# EAGLE board SparkFun_Qwiic_pHAT_Extension-Panel (EAGLE 9.5.2)
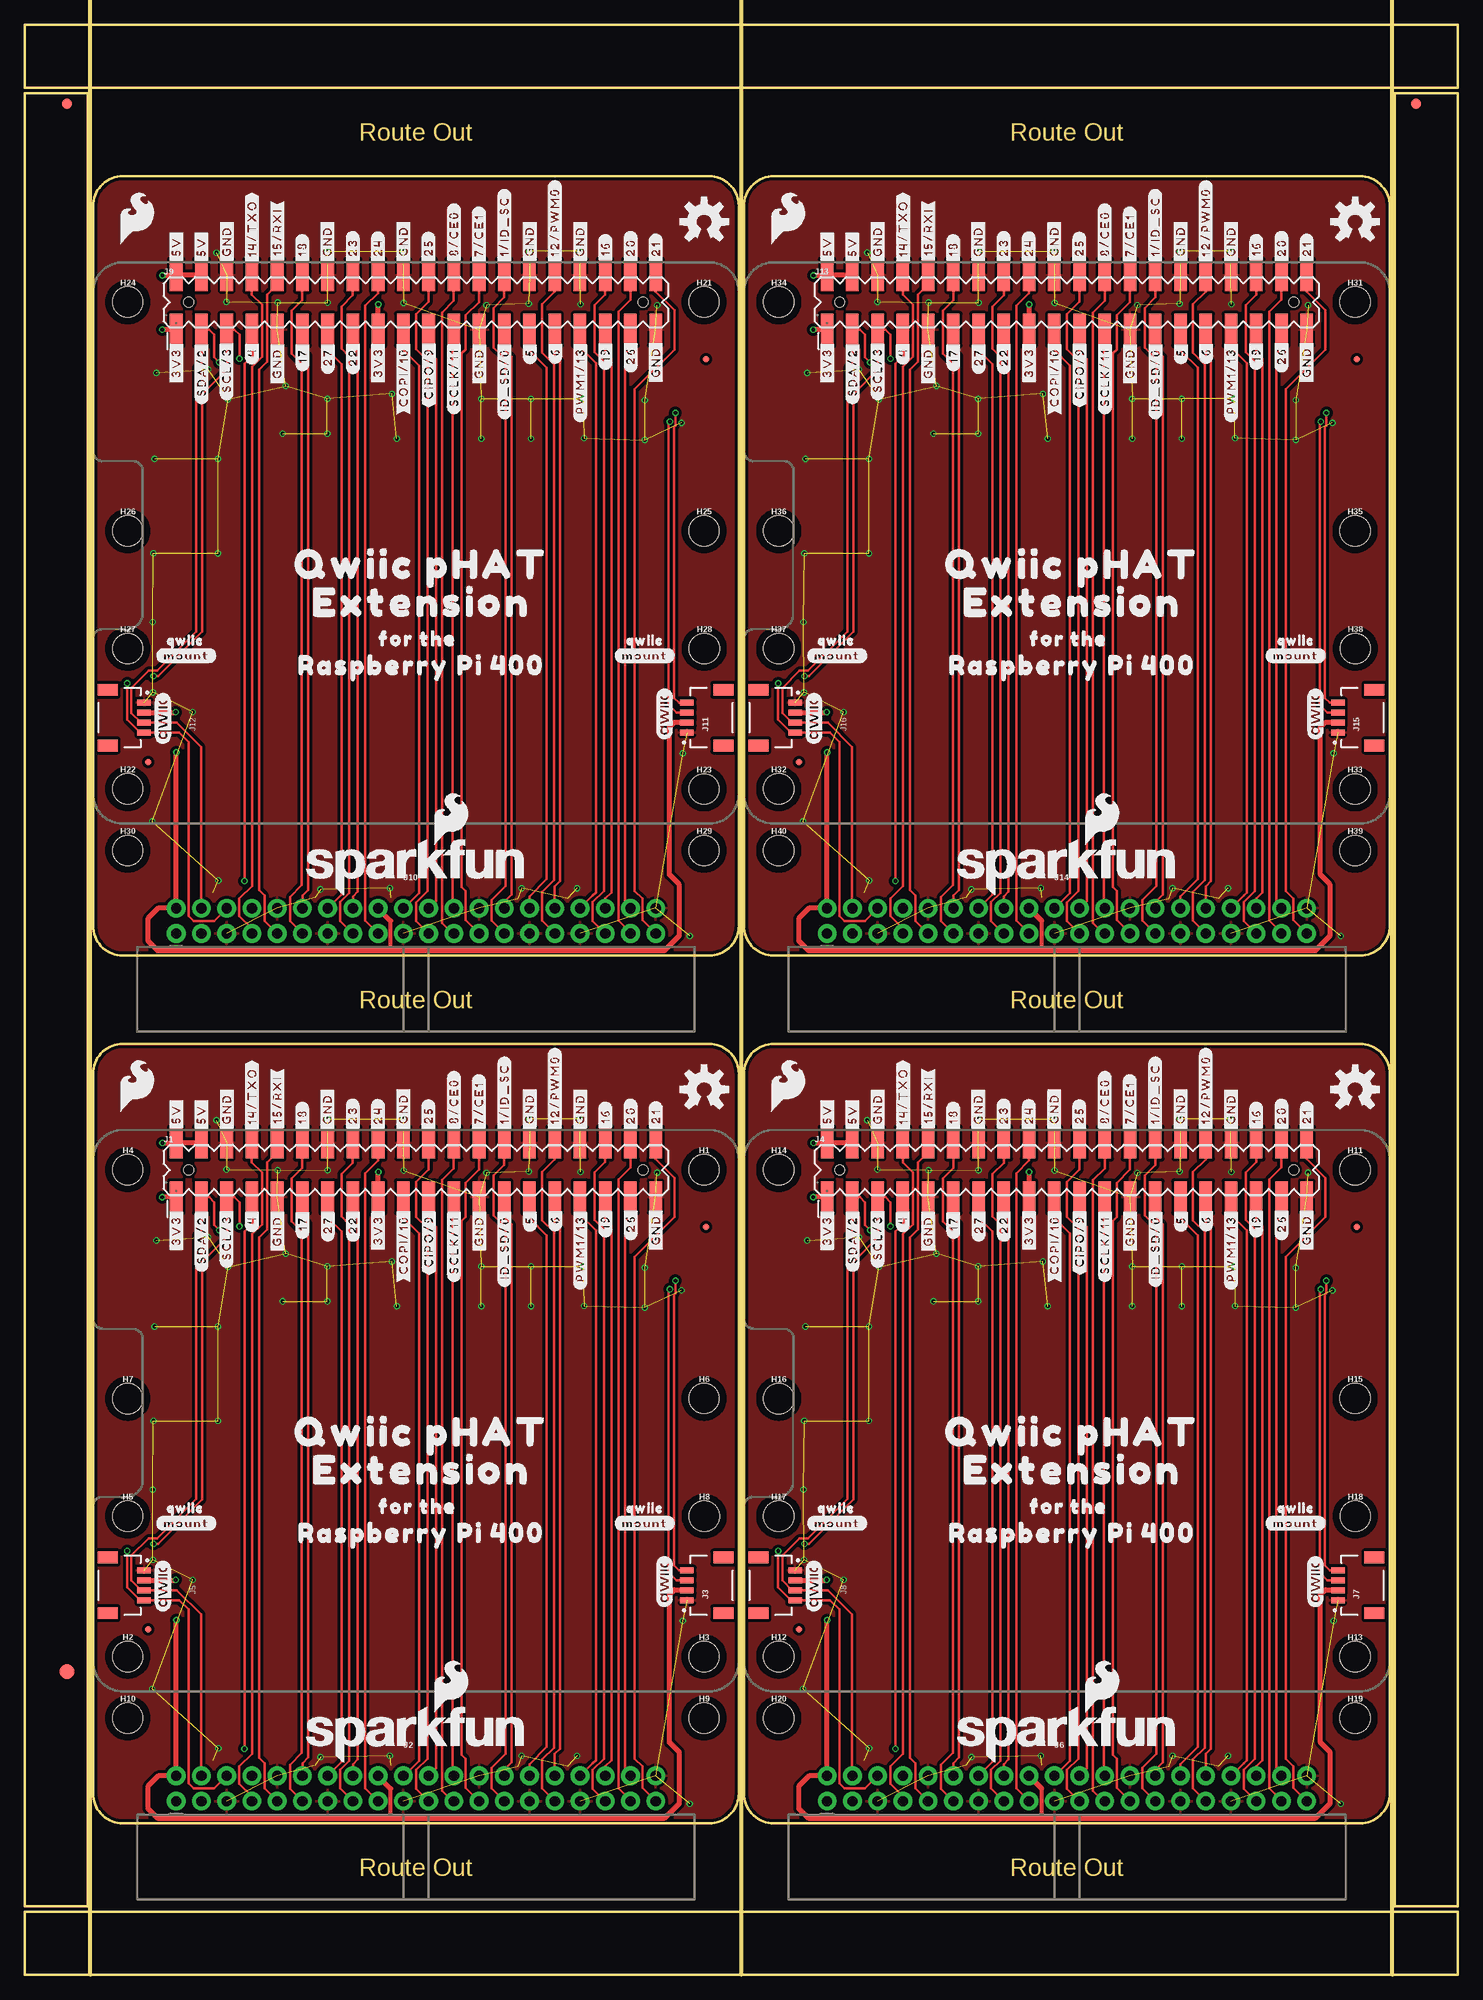
[diagram p0: board, top side]
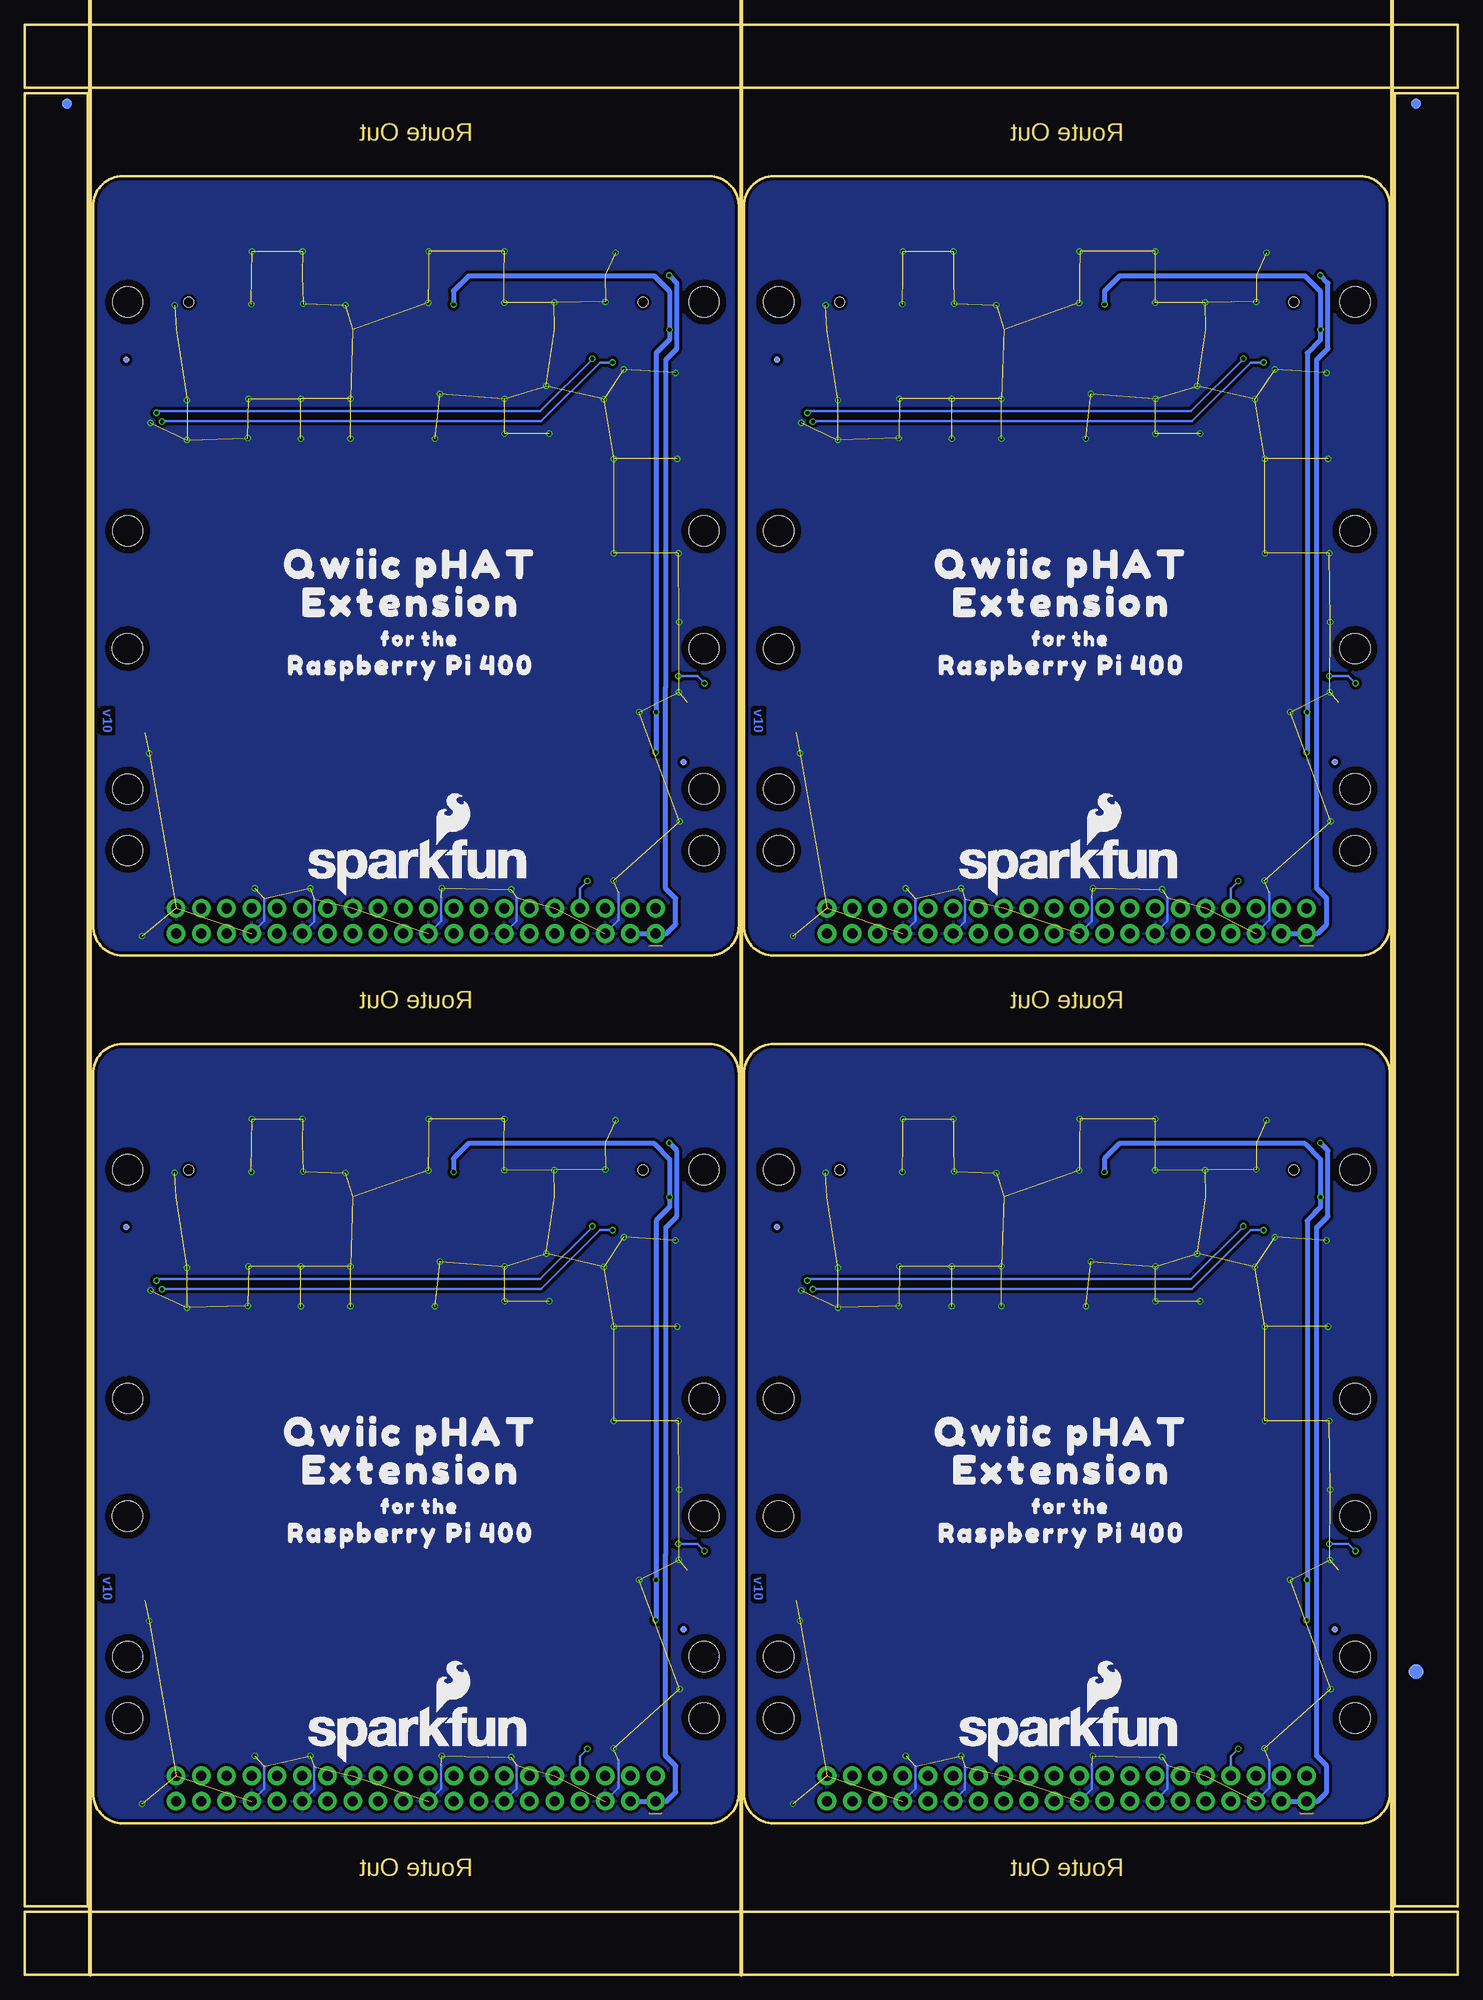
[diagram p1: board, bottom side, seen from below]

Size 144.22 x 196.21 mm. Coordinates in mm from the lower left corner, seen from the top.
Outline: 6.86,90.66 6.86,18.24 arc90 9.86,15.24 68.86,15.24 arc90 71.86,18.24 71.86,90.66 arc90 68.86,93.66 9.86,93.66 arc90 6.86,90.66
Outline: 72.37,90.66 72.37,18.24 arc90 75.37,15.24 134.37,15.24 arc90 137.37,18.24 137.37,90.66 arc90 134.37,93.66 75.37,93.66 arc90 72.37,90.66
Outline: 6.86,177.97 6.86,105.55 arc90 9.86,102.55 68.86,102.55 arc90 71.86,105.55 71.86,177.97 arc90 68.86,180.97 9.86,180.97 arc90 6.86,177.97
Outline: 72.37,177.97 72.37,105.55 arc90 75.37,102.55 134.37,102.55 arc90 137.37,105.55 137.37,177.97 arc90 134.37,180.97 75.37,180.97 arc90 72.37,177.97
Outline: 0,6.35 144.22,6.35 144.22,0 0,0 0,6.35
Outline: 137.87,189.35 144.22,189.35 144.22,6.86 137.87,6.86 137.87,189.35
Outline: 0,196.21 144.22,196.21 144.22,189.86 0,189.86 0,196.21
Outline: 0,189.35 6.35,189.35 6.35,6.86 0,6.86 0,189.35
Copper layers (1*16): Top 0.035mm / dielectric 1.5mm / Bottom 0.035mm
Design rules "SparkFun_Qwiic_pHAT_Extension": minimum track width 4mil, minimum drill 6mil, track to track 4mil, track to pad 4mil, pad to pad 4mil, via to via 4mil, smd to smd 4mil, copper to edge 4mil, drill to drill 4mil, minimum pad ring 5mil, minimum via ring 5mil, stop-mask expansion 4mil, vias tented up to drill 25mil, thermal gap 10mil
Milling: 3 lines

## Footprints (pad centres in the part's own frame; a part is rotated, then mirrored left to right if it is on the bottom)
FIDUCIAL-1X2 = smd 1 x 1: 1 0,0
FIDUCIAL-1.5X3 = smd 1.5 x 1.5: 1 0,0
FIDUCIAL-MICRO = smd 0.635 x 0.635: 1 0,0
STAND-OFF-TIGHT = hole 3.048: 0,0
RASPBERRY_PI_HAT_40_PIN_SMD_MALE = smd 1.27 x 3.175: 1 0,-1.46; 2 0,4; 3 2.54,-1.46; 4 2.54,4; 5 5.08,-1.46; 6 5.08,4; 7 7.62,-1.46; 8 7.62,4; 9 10.16,-1.46; 10 10.16,4; 11 12.7,-1.46; 12 12.7,4; 13 15.24,-1.46; 14 15.24,4; 15 17.78,-1.46; 16 17.78,4; 17 20.32,-1.46; 18 20.32,4; 19 22.86,-1.46; 20 22.86,4; 21 25.4,-1.46; 22 25.4,4; 23 27.94,-1.46; 24 27.94,4; 25 30.48,-1.46; 26 30.48,4; 27 33.02,-1.46; 28 33.02,4; 29 35.56,-1.46; 30 35.56,4; 31 38.1,-1.46; 32 38.1,4; 33 40.64,-1.46; 34 40.64,4; 35 43.18,-1.46; 36 43.18,4; 37 45.72,-1.46; 38 45.72,4; 39 48.26,-1.46; 40 48.26,4 | hole 1: 1.27,1.27; 46.99,1.27
2X20_RIGHT_ANGLE = drill 1.016 pad 1.88: 1 -24.125,1.25; 2 -24.125,-1.29; 3 -21.585,1.25; 4 -21.585,-1.29; 5 -19.045,1.25; 6 -19.045,-1.29; 7 -16.505,1.25; 8 -16.505,-1.29; 9 -13.965,1.25; 10 -13.965,-1.29; 11 -11.425,1.25; 12 -11.425,-1.29; 13 -8.885,1.25; 14 -8.885,-1.29; 15 -6.345,1.25; 16 -6.345,-1.29; 17 -3.805,1.25; 18 -3.805,-1.29; 19 -1.265,1.25; 20 -1.265,-1.29; 21 1.275,1.25; 22 1.275,-1.29; 23 3.815,1.25; 24 3.815,-1.29; 25 6.355,1.25; 26 6.355,-1.29; 27 8.895,1.25; 28 8.895,-1.29; 29 11.435,1.25; 30 11.435,-1.29; 31 13.975,1.25; 32 13.975,-1.29; 33 16.515,1.25; 34 16.515,-1.29; 35 19.055,1.25; 36 19.055,-1.29; 37 21.595,1.25; 38 21.595,-1.29; 39 24.135,1.25; 40 24.135,-1.29
JST04_1MM_RA = smd 0.6 x 1.35: 1 -1.5,0; 2 -0.5,0; 3 0.5,0; 4 1.5,0 | smd 1.2 x 2: NC1 2.8,-3.675; NC2 -2.8,-3.675

## Placement (x,y rotation side)
E$1  [FIDUCIAL-1X2]  4.23,188.27 0 top
E$2  [FIDUCIAL-1X2]  4.23,188.27 0 bottom
E$3  [FIDUCIAL-1X2]  139.99,188.27 0 top
E$4  [FIDUCIAL-1X2]  139.99,188.27 0 bottom
E$5  [FIDUCIAL-1.5X3]  4.23,30.48 0 top
E$6  [FIDUCIAL-1.5X3]  4.23,30.48 0 bottom
FD1  FIDUCIALUFIDUCIAL  [FIDUCIAL-MICRO]  12.41,34.73 0 top
FD2  FIDUCIALUFIDUCIAL  [FIDUCIAL-MICRO]  68.53,75.23 0 top
FD3  FIDUCIALUFIDUCIAL  [FIDUCIAL-MICRO]  68.53,75.22 0 bottom
FD4  FIDUCIALUFIDUCIAL  [FIDUCIAL-MICRO]  12.41,34.73 0 bottom
FD5  FIDUCIALUFIDUCIAL  [FIDUCIAL-MICRO]  77.92,34.73 0 top
FD6  FIDUCIALUFIDUCIAL  [FIDUCIAL-MICRO]  134.04,75.23 0 top
FD7  FIDUCIALUFIDUCIAL  [FIDUCIAL-MICRO]  134.04,75.22 0 bottom
FD8  FIDUCIALUFIDUCIAL  [FIDUCIAL-MICRO]  77.92,34.73 0 bottom
FD9  FIDUCIALUFIDUCIAL  [FIDUCIAL-MICRO]  12.41,122.04 0 top
FD10  FIDUCIALUFIDUCIAL  [FIDUCIAL-MICRO]  68.53,162.54 0 top
FD11  FIDUCIALUFIDUCIAL  [FIDUCIAL-MICRO]  68.53,162.53 0 bottom
FD12  FIDUCIALUFIDUCIAL  [FIDUCIAL-MICRO]  12.41,122.04 0 bottom
FD13  FIDUCIALUFIDUCIAL  [FIDUCIAL-MICRO]  77.92,122.04 0 top
FD14  FIDUCIALUFIDUCIAL  [FIDUCIAL-MICRO]  134.04,162.54 0 top
FD15  FIDUCIALUFIDUCIAL  [FIDUCIAL-MICRO]  134.04,162.53 0 bottom
FD16  FIDUCIALUFIDUCIAL  [FIDUCIAL-MICRO]  77.92,122.04 0 bottom
H1  STAND-OFFTIGHT  [STAND-OFF-TIGHT]  68.36,81 0 top
H2  STAND-OFFTIGHT  [STAND-OFF-TIGHT]  10.36,32.02 0 top
H3  STAND-OFFTIGHT  [STAND-OFF-TIGHT]  68.36,32 0 top
H4  STAND-OFFTIGHT  [STAND-OFF-TIGHT]  10.36,81 0 top
H5  STAND-OFFTIGHT  [STAND-OFF-TIGHT]  10.36,46.14 0 top
H6  STAND-OFFTIGHT  [STAND-OFF-TIGHT]  68.36,57.98 0 top
H7  STAND-OFFTIGHT  [STAND-OFF-TIGHT]  10.36,57.97 0 top
H8  STAND-OFFTIGHT  [STAND-OFF-TIGHT]  68.38,46.14 0 top
H9  STAND-OFFTIGHT  [STAND-OFF-TIGHT]  68.36,25.82 0 top
H10  STAND-OFFTIGHT  [STAND-OFF-TIGHT]  10.36,25.82 0 top
H11  STAND-OFFTIGHT  [STAND-OFF-TIGHT]  133.87,81 0 top
H12  STAND-OFFTIGHT  [STAND-OFF-TIGHT]  75.87,32.02 0 top
H13  STAND-OFFTIGHT  [STAND-OFF-TIGHT]  133.87,32 0 top
H14  STAND-OFFTIGHT  [STAND-OFF-TIGHT]  75.87,81 0 top
H15  STAND-OFFTIGHT  [STAND-OFF-TIGHT]  133.87,57.98 0 top
H16  STAND-OFFTIGHT  [STAND-OFF-TIGHT]  75.87,57.97 0 top
H17  STAND-OFFTIGHT  [STAND-OFF-TIGHT]  75.87,46.14 0 top
H18  STAND-OFFTIGHT  [STAND-OFF-TIGHT]  133.89,46.14 0 top
H19  STAND-OFFTIGHT  [STAND-OFF-TIGHT]  133.87,25.82 0 top
H20  STAND-OFFTIGHT  [STAND-OFF-TIGHT]  75.87,25.82 0 top
H21  STAND-OFFTIGHT  [STAND-OFF-TIGHT]  68.36,168.31 0 top
H22  STAND-OFFTIGHT  [STAND-OFF-TIGHT]  10.36,119.33 0 top
H23  STAND-OFFTIGHT  [STAND-OFF-TIGHT]  68.36,119.31 0 top
H24  STAND-OFFTIGHT  [STAND-OFF-TIGHT]  10.36,168.31 0 top
H25  STAND-OFFTIGHT  [STAND-OFF-TIGHT]  68.36,145.29 0 top
H26  STAND-OFFTIGHT  [STAND-OFF-TIGHT]  10.36,145.28 0 top
H27  STAND-OFFTIGHT  [STAND-OFF-TIGHT]  10.36,133.45 0 top
H28  STAND-OFFTIGHT  [STAND-OFF-TIGHT]  68.38,133.45 0 top
H29  STAND-OFFTIGHT  [STAND-OFF-TIGHT]  68.36,113.13 0 top
H30  STAND-OFFTIGHT  [STAND-OFF-TIGHT]  10.36,113.13 0 top
H31  STAND-OFFTIGHT  [STAND-OFF-TIGHT]  133.87,168.31 0 top
H32  STAND-OFFTIGHT  [STAND-OFF-TIGHT]  75.87,119.33 0 top
H33  STAND-OFFTIGHT  [STAND-OFF-TIGHT]  133.87,119.31 0 top
H34  STAND-OFFTIGHT  [STAND-OFF-TIGHT]  75.87,168.31 0 top
H35  STAND-OFFTIGHT  [STAND-OFF-TIGHT]  133.87,145.29 0 top
H36  STAND-OFFTIGHT  [STAND-OFF-TIGHT]  75.87,145.28 0 top
H37  STAND-OFFTIGHT  [STAND-OFF-TIGHT]  75.87,133.45 0 top
H38  STAND-OFFTIGHT  [STAND-OFF-TIGHT]  133.89,133.45 0 top
H39  STAND-OFFTIGHT  [STAND-OFF-TIGHT]  133.87,113.13 0 top
H40  STAND-OFFTIGHT  [STAND-OFF-TIGHT]  75.87,113.13 0 top
J1  RASPBERRYPI-40-PIN-GPIO_SMD_MALE  [RASPBERRY_PI_HAT_40_PIN_SMD_MALE]  15.23,79.7 0 top
J2  RASPBERRYPI-40-PIN-GPIO_RIGHT_ANGLE  [2X20_RIGHT_ANGLE]  39.36,18.75 0 top
J3  QWIIC_RIGHT_ANGLE  [JST04_1MM_RA]  66.63,39.18 90 top
J4  RASPBERRYPI-40-PIN-GPIO_SMD_MALE  [RASPBERRY_PI_HAT_40_PIN_SMD_MALE]  80.74,79.7 0 top
J5  QWIIC_RIGHT_ANGLE  [JST04_1MM_RA]  12,39.18 270 top
J6  RASPBERRYPI-40-PIN-GPIO_RIGHT_ANGLE  [2X20_RIGHT_ANGLE]  104.87,18.75 0 top
J7  QWIIC_RIGHT_ANGLE  [JST04_1MM_RA]  132.14,39.18 90 top
J8  QWIIC_RIGHT_ANGLE  [JST04_1MM_RA]  77.51,39.18 270 top
J9  RASPBERRYPI-40-PIN-GPIO_SMD_MALE  [RASPBERRY_PI_HAT_40_PIN_SMD_MALE]  15.23,167.01 0 top
J10  RASPBERRYPI-40-PIN-GPIO_RIGHT_ANGLE  [2X20_RIGHT_ANGLE]  39.36,106.06 0 top
J11  QWIIC_RIGHT_ANGLE  [JST04_1MM_RA]  66.63,126.49 90 top
J12  QWIIC_RIGHT_ANGLE  [JST04_1MM_RA]  12,126.49 270 top
J13  RASPBERRYPI-40-PIN-GPIO_SMD_MALE  [RASPBERRY_PI_HAT_40_PIN_SMD_MALE]  80.74,167.01 0 top
J14  RASPBERRYPI-40-PIN-GPIO_RIGHT_ANGLE  [2X20_RIGHT_ANGLE]  104.87,106.06 0 top
J15  QWIIC_RIGHT_ANGLE  [JST04_1MM_RA]  132.14,126.49 90 top
J16  QWIIC_RIGHT_ANGLE  [JST04_1MM_RA]  77.51,126.49 270 top
LOGO1  QWIIC_LOGO_5MM  [QWIIC_5MM]  13.88,39.07 90 top
LOGO2  SFE_LOGO_NAME_FLAME.2_INCH  [SFE_LOGO_NAME_FLAME_.2]  39.35,24.17 0 top
LOGO3  OSHW-LOGOM  [OSHW-LOGO-M]  68.37,89.08 0 top
LOGO4  QWIIC_LOGO_5MM  [QWIIC_5MM]  64.36,39.52 90 top
LOGO5  SFE_LOGO_NAME_FLAME.2_INCH  [SFE_LOGO_NAME_FLAME_.2]  39.15,24.17 0 bottom
LOGO6  QWIIC_LOGO_5MM  [QWIIC_5MM]  79.39,39.07 90 top
LOGO7  SFE_LOGO_NAME_FLAME.2_INCH  [SFE_LOGO_NAME_FLAME_.2]  104.86,24.17 0 top
LOGO8  OSHW-LOGOM  [OSHW-LOGO-M]  133.88,89.08 0 top
LOGO9  QWIIC_LOGO_5MM  [QWIIC_5MM]  129.87,39.52 90 top
LOGO10  SFE_LOGO_NAME_FLAME.2_INCH  [SFE_LOGO_NAME_FLAME_.2]  104.66,24.17 0 bottom
LOGO11  QWIIC_LOGO_5MM  [QWIIC_5MM]  13.88,126.38 90 top
LOGO12  SFE_LOGO_NAME_FLAME.2_INCH  [SFE_LOGO_NAME_FLAME_.2]  39.35,111.48 0 top
LOGO13  OSHW-LOGOM  [OSHW-LOGO-M]  68.37,176.39 0 top
LOGO14  QWIIC_LOGO_5MM  [QWIIC_5MM]  64.36,126.83 90 top
LOGO15  SFE_LOGO_NAME_FLAME.2_INCH  [SFE_LOGO_NAME_FLAME_.2]  39.15,111.48 0 bottom
LOGO16  QWIIC_LOGO_5MM  [QWIIC_5MM]  79.39,126.38 90 top
LOGO17  SFE_LOGO_NAME_FLAME.2_INCH  [SFE_LOGO_NAME_FLAME_.2]  104.86,111.48 0 top
LOGO18  OSHW-LOGOM  [OSHW-LOGO-M]  133.88,176.39 0 top
LOGO19  QWIIC_LOGO_5MM  [QWIIC_5MM]  129.87,126.83 90 top
LOGO20  SFE_LOGO_NAME_FLAME.2_INCH  [SFE_LOGO_NAME_FLAME_.2]  104.66,111.48 0 bottom
U$1  [#SDA#2#4]  17.79,73.91 90 top
U$2  [#SCL#3#4]  20.31,74.14 90 top
U$3  [FOR_THE40034]  39.51,47.11 0 top
U$4  [#3V3#0]  15.23,74.84 90 top
U$5  [#3V3#0]  35.54,74.87 90 top
U$6  [#4#4]  22.85,75.9 90 top
U$7  [#5#28]  50.84,75.92 90 top
U$8  [#5V#28]  15.24,86.58 90 top
U$9  [#5V#28]  17.76,86.56 90 top
U$10  [#6#28]  53.37,75.97 90 top
U$11  [#7#CE1#29]  45.69,87.7 90 top
U$12  [#8#CE0#29]  43.18,87.87 90 top
U$13  [FOR_THE40034]  39,47.11 0 bottom
U$14  [#SCLK#11#28]  43.19,73.4 90 top
U$15  [#ID_SD#0#28]  48.27,73.15 90 top
U$16  [#12#PWM0#29]  53.34,89.02 90 top
U$17  [#PWM1#13#28]  55.89,73.02 90 top
U$18  [#14#TXO#29]  22.87,88.39 90 top
U$19  [#15#RXI#29]  25.41,88.01 90 top
U$20  [#16#29]  58.42,86.35 90 top
U$21  [#17#5]  27.94,75.56 90 top
U$22  [#18#29]  27.91,86.33 90 top
U$23  [#19#28]  58.42,75.68 90 top
U$24  [#20#29]  60.96,86.48 90 top
U$25  [#21#29]  63.5,86.35 90 top
U$26  [#22#28]  33.02,75.43 90 top
U$27  [#23#29]  32.99,86.48 90 top
U$28  [#24#29]  35.53,86.45 90 top
U$29  [#25#29]  40.61,86.45 90 top
U$30  [#26#28]  60.96,75.56 90 top
U$31  [#27#18]  30.48,75.43 90 top
U$32  [#GND#28]  25.4,74.79 90 top
U$33  [#GND#28]  45.72,74.79 90 top
U$34  [#GND#28]  63.5,74.92 90 top
U$35  [#GND#28]  55.88,87.09 90 top
U$36  [#GND#28]  50.8,87.11 90 top
U$37  [#GND#28]  38.1,87.11 90 top
U$38  [#GND#28]  30.45,87.09 90 top
U$39  [#GND#28]  20.32,87.09 90 top
U$40  [#1#ID_SC#29]  48.26,88.59 90 top
U$41  [#3V3#0]  80.74,74.84 90 top
U$42  [#3V3#0]  101.05,74.87 90 top
U$43  [#4#4]  88.36,75.9 90 top
U$44  [#5#28]  116.35,75.92 90 top
U$45  [#5V#28]  80.75,86.58 90 top
U$46  [#5V#28]  83.27,86.56 90 top
U$47  [#6#28]  118.88,75.97 90 top
U$48  [#7#CE1#29]  111.2,87.7 90 top
U$49  [#8#CE0#29]  108.69,87.87 90 top
U$50  [#12#PWM0#29]  118.85,89.02 90 top
U$51  [#CIPO#9#28]  40.65,73.78 90 top
U$52  [#COPI#10#28]  38.11,73.4 90 top
U$53  [#16#29]  123.93,86.35 90 top
U$54  [#17#5]  93.45,75.56 90 top
U$55  [#18#29]  93.42,86.33 90 top
U$56  [#19#28]  123.93,75.68 90 top
U$57  [#20#29]  126.47,86.48 90 top
U$58  [#21#29]  129.01,86.35 90 top
U$59  [#22#28]  98.53,75.43 90 top
U$60  [#23#29]  98.5,86.48 90 top
U$61  [#24#29]  101.04,86.45 90 top
U$62  [#25#29]  106.12,86.45 90 top
U$63  [#26#28]  126.47,75.56 90 top
U$64  [#27#18]  95.99,75.43 90 top
U$65  [#GND#28]  90.91,74.79 90 top
U$66  [#GND#28]  111.23,74.79 90 top
U$67  [#GND#28]  129.01,74.92 90 top
U$68  [#GND#28]  121.39,87.09 90 top
U$69  [#GND#28]  116.31,87.11 90 top
U$70  [#GND#28]  103.61,87.11 90 top
U$71  [#GND#28]  95.96,87.09 90 top
U$72  [#GND#28]  85.83,87.09 90 top
U$73  [#1#ID_SC#29]  113.77,88.59 90 top
U$74  [#SDA#2#4]  83.3,73.91 90 top
U$75  [QWIIC_PHAT31]  39.89,54.6 0 top
U$76  [EXTENSION32]  39.89,50.79 0 top
U$77  [#SCL#3#4]  85.82,74.14 90 top
U$78  [#SCLK#11#28]  108.7,73.4 90 top
U$79  [#ID_SD#0#28]  113.78,73.15 90 top
U$80  [#PWM1#13#28]  121.4,73.02 90 top
U$81  [SFE_LOGO_FLAME_.2]  11.31,89.4 0 top
U$82  [#MOUNT#29]  16.25,45.42 0 top
U$83  [#MOUNT#29]  62.38,45.42 0 top
U$84  [QWIIC30]  16.12,46.95 0 top
U$85  [QWIIC30]  62.38,46.95 0 top
U$86  [RASPBERRY_PI_40033]  39.89,44.44 0 top
U$87  [SFE_LOGO_FLAME_.2]  76.82,89.4 0 top
U$88  [#CIPO#9#28]  106.16,73.78 90 top
U$89  [QWIIC_PHAT31]  39.89,54.6 0 bottom
U$90  [EXTENSION32]  39.89,50.79 0 bottom
U$91  [RASPBERRY_PI_40033]  39.89,44.44 0 bottom
U$92  [#COPI#10#28]  103.62,73.4 90 top
U$93  [#MOUNT#29]  81.76,45.42 0 top
U$94  [#MOUNT#29]  127.89,45.42 0 top
U$95  [QWIIC30]  81.63,46.95 0 top
U$96  [QWIIC30]  127.89,46.95 0 top
U$97  [#14#TXO#29]  88.38,88.39 90 top
U$98  [#15#RXI#29]  90.92,88.01 90 top
U$99  [QWIIC_PHAT31]  105.4,54.6 0 top
U$100  [EXTENSION32]  105.4,50.79 0 top
U$101  [RASPBERRY_PI_40033]  105.4,44.44 0 top
U$102  [QWIIC_PHAT31]  105.4,54.6 0 bottom
U$103  [EXTENSION32]  105.4,50.79 0 bottom
U$104  [RASPBERRY_PI_40033]  105.4,44.44 0 bottom
U$105  [FOR_THE40034]  105.02,47.11 0 top
U$106  [FOR_THE40034]  104.51,47.11 0 bottom
U$107  [#3V3#0]  15.23,162.15 90 top
U$108  [#3V3#0]  35.54,162.18 90 top
U$109  [#4#4]  22.85,163.21 90 top
U$110  [#5#28]  50.84,163.23 90 top
U$111  [#5V#28]  15.24,173.89 90 top
U$112  [#5V#28]  17.76,173.87 90 top
U$113  [#6#28]  53.37,163.28 90 top
U$114  [#7#CE1#29]  45.69,175.01 90 top
U$115  [#8#CE0#29]  43.18,175.18 90 top
U$116  [#12#PWM0#29]  53.34,176.33 90 top
U$117  [#16#29]  58.42,173.66 90 top
U$118  [#17#5]  27.94,162.87 90 top
U$119  [#18#29]  27.91,173.64 90 top
U$120  [#19#28]  58.42,162.99 90 top
U$121  [#20#29]  60.96,173.79 90 top
U$122  [#21#29]  63.5,173.66 90 top
U$123  [#22#28]  33.02,162.74 90 top
U$124  [#23#29]  32.99,173.79 90 top
U$125  [#24#29]  35.53,173.76 90 top
U$126  [#25#29]  40.61,173.76 90 top
U$127  [#26#28]  60.96,162.87 90 top
U$128  [#27#18]  30.48,162.74 90 top
U$129  [#GND#28]  25.4,162.1 90 top
U$130  [#GND#28]  45.72,162.1 90 top
U$131  [#GND#28]  63.5,162.23 90 top
U$132  [#GND#28]  55.88,174.4 90 top
U$133  [#GND#28]  50.8,174.42 90 top
U$134  [#GND#28]  38.1,174.42 90 top
U$135  [#GND#28]  30.45,174.4 90 top
U$136  [#GND#28]  20.32,174.4 90 top
U$137  [#1#ID_SC#29]  48.26,175.9 90 top
U$138  [#SDA#2#4]  17.79,161.22 90 top
U$139  [#SCL#3#4]  20.31,161.45 90 top
U$140  [#SCLK#11#28]  43.19,160.71 90 top
U$141  [#ID_SD#0#28]  48.27,160.46 90 top
U$142  [#PWM1#13#28]  55.89,160.33 90 top
U$143  [SFE_LOGO_FLAME_.2]  11.31,176.71 0 top
U$144  [#CIPO#9#28]  40.65,161.09 90 top
U$145  [#COPI#10#28]  38.11,160.71 90 top
U$146  [#MOUNT#29]  16.25,132.73 0 top
U$147  [#MOUNT#29]  62.38,132.73 0 top
U$148  [QWIIC30]  16.12,134.26 0 top
U$149  [QWIIC30]  62.38,134.26 0 top
U$150  [#14#TXO#29]  22.87,175.7 90 top
U$151  [#15#RXI#29]  25.41,175.32 90 top
U$152  [QWIIC_PHAT31]  39.89,141.91 0 top
U$153  [EXTENSION32]  39.89,138.1 0 top
U$154  [RASPBERRY_PI_40033]  39.89,131.75 0 top
U$155  [QWIIC_PHAT31]  39.89,141.91 0 bottom
U$156  [EXTENSION32]  39.89,138.1 0 bottom
U$157  [RASPBERRY_PI_40033]  39.89,131.75 0 bottom
U$158  [FOR_THE40034]  39.51,134.42 0 top
U$159  [FOR_THE40034]  39,134.42 0 bottom
U$160  [#3V3#0]  80.74,162.15 90 top
U$161  [#3V3#0]  101.05,162.18 90 top
U$162  [#4#4]  88.36,163.21 90 top
U$163  [#5#28]  116.35,163.23 90 top
U$164  [#5V#28]  80.75,173.89 90 top
U$165  [#5V#28]  83.27,173.87 90 top
U$166  [#6#28]  118.88,163.28 90 top
U$167  [#7#CE1#29]  111.2,175.01 90 top
U$168  [#8#CE0#29]  108.69,175.18 90 top
U$169  [#12#PWM0#29]  118.85,176.33 90 top
U$170  [#16#29]  123.93,173.66 90 top
U$171  [#17#5]  93.45,162.87 90 top
U$172  [#18#29]  93.42,173.64 90 top
U$173  [#19#28]  123.93,162.99 90 top
U$174  [#20#29]  126.47,173.79 90 top
U$175  [#21#29]  129.01,173.66 90 top
U$176  [#22#28]  98.53,162.74 90 top
U$177  [#23#29]  98.5,173.79 90 top
U$178  [#24#29]  101.04,173.76 90 top
U$179  [#25#29]  106.12,173.76 90 top
U$180  [#26#28]  126.47,162.87 90 top
U$181  [#27#18]  95.99,162.74 90 top
U$182  [#GND#28]  90.91,162.1 90 top
U$183  [#GND#28]  111.23,162.1 90 top
U$184  [#GND#28]  129.01,162.23 90 top
U$185  [#GND#28]  121.39,174.4 90 top
U$186  [#GND#28]  116.31,174.42 90 top
U$187  [#GND#28]  103.61,174.42 90 top
U$188  [#GND#28]  95.96,174.4 90 top
U$189  [#GND#28]  85.83,174.4 90 top
U$190  [#1#ID_SC#29]  113.77,175.9 90 top
U$191  [#SDA#2#4]  83.3,161.22 90 top
U$192  [#SCL#3#4]  85.82,161.45 90 top
U$193  [#SCLK#11#28]  108.7,160.71 90 top
U$194  [#ID_SD#0#28]  113.78,160.46 90 top
U$195  [#PWM1#13#28]  121.4,160.33 90 top
U$196  [SFE_LOGO_FLAME_.2]  76.82,176.71 0 top
U$197  [#CIPO#9#28]  106.16,161.09 90 top
U$198  [#COPI#10#28]  103.62,160.71 90 top
U$199  [#MOUNT#29]  81.76,132.73 0 top
U$200  [#MOUNT#29]  127.89,132.73 0 top
U$201  [QWIIC30]  81.63,134.26 0 top
U$202  [QWIIC30]  127.89,134.26 0 top
U$203  [#14#TXO#29]  88.38,175.7 90 top
U$204  [#15#RXI#29]  90.92,175.32 90 top
U$205  [QWIIC_PHAT31]  105.4,141.91 0 top
U$206  [EXTENSION32]  105.4,138.1 0 top
U$207  [RASPBERRY_PI_40033]  105.4,131.75 0 top
U$208  [QWIIC_PHAT31]  105.4,141.91 0 bottom
U$209  [EXTENSION32]  105.4,138.1 0 bottom
U$210  [RASPBERRY_PI_40033]  105.4,131.75 0 bottom
U$211  [FOR_THE40034]  105.02,134.42 0 top
U$212  [FOR_THE40034]  104.51,134.42 0 bottom

## Library data of the parts
E$1-E$4 FD1-FD16 LOGO1-LOGO20 U$81 U$87 U$143 U$196 = SparkFun-Aesthetics
E$5 E$6 = SparkFun-Retired
H1-H40 = SparkFun-Hardware
J1 J4 J9 J13 = SparkFun-Connectors; PROD_ID: CONN-14915
J2 J6 J10 J14 = SparkFun-Connectors
J3 J5 J7 J8 J11 J12 J15 J16 = SparkFun-Connectors; PROD_ID: CONN-13694
U$1-U$80 U$82-U$86 U$88-U$142 U$144-U$195 U$197-U$212 = top

## Nets
0/ID_SD: J1.27 J2.27
0/ID_SD1: J4.27 J6.27
0/ID_SD2: J9.27 J10.27
0/ID_SD3: J13.27 J14.27
1/ID_SC: J1.28 J2.28
1/ID_SC1: J4.28 J6.28
1/ID_SC2: J9.28 J10.28
1/ID_SC3: J13.28 J14.28
2/SDA: J1.3 J2.3 J3.3 J5.3
2/SDA1: J4.3 J6.3 J7.3 J8.3
2/SDA2: J9.3 J10.3 J11.3 J12.3
2/SDA3: J13.3 J14.3 J15.3 J16.3
3.3V: J1.1 J1.17 J2.1 J2.17 J3.2 J5.2
3.3V1: J4.1 J4.17 J6.1 J6.17 J7.2 J8.2
3.3V2: J9.1 J9.17 J10.1 J10.17 J11.2 J12.2
3.3V3: J13.1 J13.17 J14.1 J14.17 J15.2 J16.2
3/SCL: J1.5 J2.5 J3.4 J5.4
3/SCL1: J4.5 J6.5 J7.4 J8.4
3/SCL2: J9.5 J10.5 J11.4 J12.4
3/SCL3: J13.5 J14.5 J15.4 J16.4
5V: J1.2 J1.4 J2.2 J2.4
5V1: J4.2 J4.4 J6.2 J6.4
5V2: J9.2 J9.4 J10.2 J10.4
5V3: J13.2 J13.4 J14.2 J14.4
7/CE1: J1.26 J2.26
7/CE2: J4.26 J6.26
7/CE3: J9.26 J10.26
7/CE4: J13.26 J14.26
8/CE0: J1.24 J2.24
8/CE1: J4.24 J6.24
8/CE2: J9.24 J10.24
8/CE3: J13.24 J14.24
9/CIPO: J1.21 J2.21
9/CIPO1: J4.21 J6.21
9/CIPO2: J9.21 J10.21
9/CIPO3: J13.21 J14.21
10/COPI: J1.19 J2.19
10/COPI1: J4.19 J6.19
10/COPI2: J9.19 J10.19
10/COPI3: J13.19 J14.19
11/SCLK: J1.23 J2.23
11/SCLK1: J4.23 J6.23
11/SCLK2: J9.23 J10.23
11/SCLK3: J13.23 J14.23
12/PWM0: J1.32 J2.32
12/PWM1: J4.32 J6.32
12/PWM2: J9.32 J10.32
12/PWM3: J13.32 J14.32
13/PWM1: J1.33 J2.33
13/PWM2: J4.33 J6.33
13/PWM3: J9.33 J10.33
13/PWM4: J13.33 J14.33
14/TXO: J1.8 J2.8
14/TXO1: J4.8 J6.8
14/TXO2: J9.8 J10.8
14/TXO3: J13.8 J14.8
15/RXI: J1.10 J2.10
15/RXI1: J4.10 J6.10
15/RXI2: J9.10 J10.10
15/RXI3: J13.10 J14.10
18/PCM_CLK: J1.12 J2.12
18/PCM_CLK1: J4.12 J6.12
18/PCM_CLK2: J9.12 J10.12
18/PCM_CLK3: J13.12 J14.12
19/PCM_FS: J1.35 J2.35
19/PCM_FS1: J4.35 J6.35
19/PCM_FS2: J9.35 J10.35
19/PCM_FS3: J13.35 J14.35
20/PCM_DIN: J1.38 J2.38
20/PCM_DIN1: J4.38 J6.38
20/PCM_DIN2: J9.38 J10.38
20/PCM_DIN3: J13.38 J14.38
21/PCM_DOUT: J1.40 J2.40
21/PCM_DOUT1: J4.40 J6.40
21/PCM_DOUT2: J9.40 J10.40
21/PCM_DOUT3: J13.40 J14.40
GND: J1.6 J1.9 J1.14 J1.20 J1.25 J1.30 J1.34 J1.39 J2.6 J2.9 J2.14 J2.20 J2.25 J2.30 J2.34 J2.39 J3.1 J5.1
GND1: J4.6 J4.9 J4.14 J4.20 J4.25 J4.30 J4.34 J4.39 J6.6 J6.9 J6.14 J6.20 J6.25 J6.30 J6.34 J6.39 J7.1 J8.1
GND2: J9.6 J9.9 J9.14 J9.20 J9.25 J9.30 J9.34 J9.39 J10.6 J10.9 J10.14 J10.20 J10.25 J10.30 J10.34 J10.39 J11.1 J12.1
GND3: J13.6 J13.9 J13.14 J13.20 J13.25 J13.30 J13.34 J13.39 J14.6 J14.9 J14.14 J14.20 J14.25 J14.30 J14.34 J14.39 J15.1 J16.1
GP1: J4.7 J6.7
GP2: J4.29 J6.29
GP3: J4.31 J6.31
GP4: J1.7 J2.7
GP5: J1.29 J2.29
GP6: J1.31 J2.31
GP7: J4.36 J6.36
GP8: J4.11 J6.11
GP9: J4.15 J6.15
GP10: J4.16 J6.16
GP11: J4.18 J6.18
GP12: J4.22 J6.22
GP13: J4.37 J6.37
GP14: J4.13 J6.13
GP15: J9.7 J10.7
GP16: J1.36 J2.36
GP17: J1.11 J2.11
GP18: J9.29 J10.29
GP19: J9.31 J10.31
GP20: J9.36 J10.36
GP21: J9.11 J10.11
GP22: J1.15 J2.15
GP23: J1.16 J2.16
GP24: J1.18 J2.18
GP25: J1.22 J2.22
GP26: J1.37 J2.37
GP27: J1.13 J2.13
GP28: J9.15 J10.15
GP29: J9.16 J10.16
GP30: J9.18 J10.18
GP31: J9.22 J10.22
GP32: J9.37 J10.37
GP33: J9.13 J10.13
GP34: J13.7 J14.7
GP35: J13.29 J14.29
GP36: J13.31 J14.31
GP37: J13.36 J14.36
GP38: J13.11 J14.11
GP39: J13.15 J14.15
GP40: J13.16 J14.16
GP41: J13.18 J14.18
GP42: J13.22 J14.22
GP43: J13.37 J14.37
GP44: J13.13 J14.13

## Tracks (layer width: path | path; a pad name or v marks a point on that pad's centre or on a via)
0/ID_SD
  Top 0.254: J1.27 48.25,76.23 48.99,75.48 48.99,21.36 48.25,20.62 J2.27
0/ID_SD1
  Top 0.254: J4.27 113.76,76.23 114.5,75.48 114.5,21.36 113.76,20.62 J6.27
0/ID_SD2
  Top 0.254: J9.27 48.25,163.54 48.99,162.79 48.99,108.67 48.25,107.93 J10.27
0/ID_SD3
  Top 0.254: J13.27 113.76,163.54 114.5,162.79 114.5,108.67 113.76,107.93 J14.27
1/ID_SC
  Top 0.254: J1.28 48.25,81.47 47.19,80.41 47.19,76.41 47.87,75.73 48.25,75.35 48.37,75.23 48.37,22.23 46.97,20.84 46.97,18.75 J2.28
1/ID_SC1
  Top 0.254: J4.28 113.76,81.47 112.7,80.41 112.7,76.41 113.38,75.73 113.76,75.35 113.88,75.23 113.88,22.23 112.48,20.84 112.48,18.75 J6.28
1/ID_SC2
  Top 0.254: J9.28 48.25,168.78 47.19,167.72 47.19,163.73 47.87,163.05 48.25,162.66 48.37,162.55 48.37,109.55 46.97,108.14 46.97,106.06 J10.28
1/ID_SC3
  Top 0.254: J13.28 113.76,168.78 112.7,167.72 112.7,163.73 113.38,163.05 113.76,162.66 113.88,162.55 113.88,109.55 112.48,108.14 112.48,106.06 J14.28
2/SDA  (via drill 0.38)
  Top 0.254: v19.57,74.92 19.06,75.43 19.06,77.72 18.54,78.24 J1.3 17.79,78.22 17.79,74.92 17.27,74.4 17.27,47.85 13.31,43.9 12.45,43.9 10.72,42.18 10.72,39.66 11.7,38.68 J5.3 15.3,38.68 17.75,36.23 17.75,20.02 J2.3 | J3.3 65.56,39.68 64.79,40.46 64.79,68.83 v64.92,68.97
  Bottom 0.254: v19.57,74.92 20.84,74.92 26.76,69 64.88,69 v64.92,68.97
2/SDA1  (via drill 0.38)
  Top 0.254: v85.08,74.92 84.57,75.43 84.57,77.72 84.05,78.24 J4.3 83.3,78.22 83.3,74.92 82.78,74.4 82.78,47.85 78.82,43.9 77.95,43.9 76.23,42.18 76.23,39.66 77.21,38.68 J8.3 80.81,38.68 83.26,36.23 83.26,20.02 J6.3 | J7.3 131.07,39.68 130.3,40.46 130.3,68.83 v130.43,68.97
  Bottom 0.254: v85.08,74.92 86.35,74.92 92.27,69 130.39,69 v130.43,68.97
2/SDA2  (via drill 0.38)
  Top 0.254: v19.57,162.24 19.06,162.74 19.06,165.03 18.54,165.55 J9.3 17.79,165.53 17.79,162.24 17.27,161.71 17.27,135.16 13.31,131.21 12.45,131.21 10.72,129.49 10.72,126.97 11.7,125.99 J12.3 15.3,125.99 17.75,123.55 17.75,107.33 J10.3 | J11.3 65.56,126.99 64.79,127.77 64.79,156.15 v64.92,156.28
  Bottom 0.254: v19.57,162.24 20.84,162.24 26.76,156.31 64.88,156.31 v64.92,156.28
2/SDA3  (via drill 0.38)
  Top 0.254: v85.08,162.24 84.57,162.74 84.57,165.03 84.05,165.55 J13.3 83.3,165.53 83.3,162.24 82.78,161.71 82.78,135.16 78.82,131.21 77.95,131.21 76.23,129.49 76.23,126.97 77.21,125.99 J16.3 80.81,125.99 83.26,123.55 83.26,107.33 J14.3 | J15.3 131.07,126.99 130.3,127.77 130.3,156.15 v130.43,156.28
  Bottom 0.254: v85.08,162.24 86.35,162.24 92.27,156.31 130.39,156.31 v130.43,156.28
3.3V  (via drill 0.38)
  Top 0.406: 36.83,15.73 36.83,18.73
  Top 0.508: J1.1 13.84,78.24 v13.83,78.23 | J1.17 35.57,78.26 v35.57,80.77 | 36.83,18.73 J2.17 | v15.25,35.68 15.23,35.66 J2.1 13.42,20 12.37,18.95 12.37,16.73 13.37,15.73 36.83,15.73 64.37,15.73 65.87,17.23 65.87,22.38 64.88,23.38 64.88,38.24 65.37,38.73 66.58,38.73 J3.2 | J5.2 15.13,39.68 v15.18,39.73
  Bottom 0.508: v35.57,80.77 35.57,82.12 34.07,83.62 15.37,83.62 13.83,82.08 v13.83,78.23 13.83,77.24 15.18,75.88 v15.18,39.73 15.18,35.75 v15.25,35.68
3.3V1  (via drill 0.38)
  Top 0.406: 102.34,15.73 102.34,18.73
  Top 0.508: J4.1 79.35,78.24 v79.34,78.23 | J4.17 101.08,78.26 v101.08,80.77 | 102.34,18.73 J6.17 | v80.76,35.68 80.74,35.66 J6.1 78.93,20 77.88,18.95 77.88,16.73 78.88,15.73 102.34,15.73 129.88,15.73 131.38,17.23 131.38,22.38 130.39,23.38 130.39,38.24 130.88,38.73 132.09,38.73 J7.2 | J8.2 80.64,39.68 v80.69,39.73
  Bottom 0.508: v101.08,80.77 101.08,82.12 99.58,83.62 80.88,83.62 79.34,82.08 v79.34,78.23 79.34,77.24 80.69,75.88 v80.69,39.73 80.69,35.75 v80.76,35.68
3.3V2  (via drill 0.38)
  Top 0.406: 36.83,103.05 36.83,106.04
  Top 0.508: J9.1 13.84,165.55 v13.83,165.54 | J9.17 35.57,165.57 v35.57,168.08 | 36.83,106.04 J10.17 | v15.25,122.99 15.23,122.97 J10.1 13.42,107.31 12.37,106.26 12.37,104.05 13.37,103.05 36.83,103.05 64.37,103.05 65.87,104.55 65.87,109.69 64.88,110.68 64.88,125.55 65.37,126.05 66.58,126.05 J11.2 | J12.2 15.13,126.99 v15.18,127.05
  Bottom 0.508: v35.57,168.08 35.57,169.43 34.07,170.93 15.37,170.93 13.83,169.39 v13.83,165.54 13.83,164.55 15.18,163.19 v15.18,127.05 15.18,123.06 v15.25,122.99
3.3V3  (via drill 0.38)
  Top 0.406: 102.34,103.05 102.34,106.04
  Top 0.508: J13.1 79.35,165.55 v79.34,165.54 | J13.17 101.08,165.57 v101.08,168.08 | 102.34,106.04 J14.17 | v80.76,122.99 80.74,122.97 J14.1 78.93,107.31 77.88,106.26 77.88,104.05 78.88,103.05 102.34,103.05 129.88,103.05 131.38,104.55 131.38,109.69 130.39,110.68 130.39,125.55 130.88,126.05 132.09,126.05 J15.2 | J16.2 80.64,126.99 v80.69,127.05
  Bottom 0.508: v101.08,168.08 101.08,169.43 99.58,170.93 80.88,170.93 79.34,169.39 v79.34,165.54 79.34,164.55 80.69,163.19 v80.69,127.05 80.69,123.06 v80.76,122.99
3/SCL  (via drill 0.38)
  Top 0.254: v21.6,75.31 21.6,77.72 21.08,78.23 20.37,78.23 20.36,78.24 J1.5 20.37,78.18 20.37,74.23 17.87,71.73 17.87,47.82 13.4,43.35 v12.96,43.35 | J3.4 65.83,40.68 65.34,41.17 65.34,68.41 65.47,68.55 v65.47,69.84 | J2.5 19.05,18.73 16.99,18.73 16.48,19.24 16.48,36.74 15.54,37.68 J5.4 11.59,37.68 10.29,38.98 10.29,42.62 v10.3,42.63
  Bottom 0.254: 65.31,70 26.86,70 21.6,75.26 v21.6,75.31 | v65.47,69.84 65.31,70 | 65.31,70 | v12.96,43.35 11.02,43.35 v10.3,42.63
3/SCL1  (via drill 0.38)
  Top 0.254: v87.11,75.31 87.11,77.72 86.59,78.23 85.88,78.23 85.87,78.24 J4.5 85.88,78.18 85.88,74.23 83.38,71.73 83.38,47.82 78.91,43.35 v78.46,43.35 | J7.4 131.34,40.68 130.85,41.17 130.85,68.41 130.98,68.55 v130.98,69.84 | J6.5 84.56,18.73 82.5,18.73 81.99,19.24 81.99,36.74 81.05,37.68 J8.4 77.1,37.68 75.8,38.98 75.8,42.62 v75.81,42.63
  Bottom 0.254: 130.82,70 92.37,70 87.11,75.26 v87.11,75.31 | v130.98,69.84 130.82,70 | 130.82,70 | v78.46,43.35 76.53,43.35 v75.81,42.63
3/SCL2  (via drill 0.38)
  Top 0.254: v21.6,162.62 21.6,165.03 21.08,165.55 20.37,165.55 20.36,165.55 J9.5 20.37,165.49 20.37,161.55 17.87,159.05 17.87,135.13 13.4,130.66 v12.96,130.66 | J11.4 65.83,127.99 65.34,128.48 65.34,155.72 65.47,155.86 v65.47,157.15 | J10.5 19.05,106.05 16.99,106.05 16.48,106.55 16.48,124.05 15.54,124.99 J12.4 11.59,124.99 10.29,126.29 10.29,129.93 v10.3,129.94
  Bottom 0.254: 65.31,157.31 26.86,157.31 21.6,162.57 v21.6,162.62 | v65.47,157.15 65.31,157.31 | 65.31,157.31 | v12.96,130.66 11.02,130.66 v10.3,129.94
3/SCL3  (via drill 0.38)
  Top 0.254: v87.11,162.62 87.11,165.03 86.59,165.55 85.88,165.55 85.87,165.55 J13.5 85.88,165.49 85.88,161.55 83.38,159.05 83.38,135.13 78.91,130.66 v78.46,130.66 | J15.4 131.34,127.99 130.85,128.48 130.85,155.72 130.98,155.86 v130.98,157.15 | J14.5 84.56,106.05 82.5,106.05 81.99,106.55 81.99,124.05 81.05,124.99 J16.4 77.1,124.99 75.8,126.29 75.8,129.93 v75.81,129.94
  Bottom 0.254: 130.82,157.31 92.37,157.31 87.11,162.57 v87.11,162.62 | v130.98,157.15 130.82,157.31 | 130.82,157.31 | v78.46,130.66 76.53,130.66 v75.81,129.94
5V  (via drill 0.38)
  Top 0.508: J1.4 J1.2 v13.87,83.7 v13.85,83.69
  Bottom 0.508: J2.4 J2.2 14.12,17.46 13.22,18.37 13.22,21 14.22,22 14.22,42.27 14.21,42.29 14.21,75.2 13.09,76.32 13.09,82.93 v13.85,83.69
5V1  (via drill 0.38)
  Top 0.508: J4.4 J4.2 79.38,83.7 v79.36,83.69
  Bottom 0.508: J6.4 J6.2 79.63,17.46 78.73,18.37 78.73,21 79.73,22 79.73,42.27 79.72,42.29 79.72,75.2 78.6,76.32 78.6,82.93 v79.36,83.69
5V2  (via drill 0.38)
  Top 0.508: J9.4 J9.2 v13.87,171.01 v13.85,171
  Bottom 0.508: J10.4 J10.2 14.12,104.77 13.22,105.68 13.22,108.3 14.22,109.31 14.22,129.59 14.21,129.6 14.21,162.51 13.09,163.63 13.09,170.24 v13.85,171
5V3  (via drill 0.38)
  Top 0.508: J13.4 J13.2 79.38,171.01 v79.36,171
  Bottom 0.508: J14.4 J14.2 79.63,104.77 78.73,105.68 78.73,108.3 79.73,109.31 79.73,129.59 79.72,129.6 79.72,162.51 78.6,163.63 78.6,170.24 v79.36,171
7/CE1
  Top 0.254: J1.26 45.71,81 44.37,79.66 44.37,76.23 43.97,75.83 43.97,22.13 44.37,21.73 44.37,18.81 J2.26
7/CE2
  Top 0.254: J4.26 111.22,81 109.88,79.66 109.88,76.23 109.48,75.83 109.48,22.13 109.88,21.73 109.88,18.81 J6.26
7/CE3
  Top 0.254: J9.26 45.71,168.31 44.37,166.97 44.37,163.55 43.97,163.15 43.97,109.44 44.37,109.05 44.37,106.12 J10.26
7/CE4
  Top 0.254: J13.26 111.22,168.31 109.88,166.97 109.88,163.55 109.48,163.15 109.48,109.44 109.88,109.05 109.88,106.12 J14.26
8/CE0
  Top 0.254: J1.24 43.17,81.13 41.98,79.94 41.98,18.5 43.01,17.46 J2.24
8/CE1
  Top 0.254: J4.24 108.68,81.13 107.49,79.94 107.49,18.5 108.52,17.46 J6.24
8/CE2
  Top 0.254: J9.24 43.17,168.45 41.98,167.25 41.98,105.81 43.01,104.77 J10.24
8/CE3
  Top 0.254: J13.24 108.68,168.45 107.49,167.25 107.49,105.81 108.52,104.77 J14.24
9/CIPO
  Top 0.254: J1.21 40.63,76 41.38,75.25 41.38,20.75 J2.21
9/CIPO1
  Top 0.254: J4.21 106.14,76 106.89,75.25 106.89,20.75 J6.21
9/CIPO2
  Top 0.254: J9.21 40.63,163.31 41.38,162.56 41.38,108.05 J10.21
9/CIPO3
  Top 0.254: J13.21 106.14,163.31 106.89,162.56 106.89,108.05 J14.21
10/COPI
  Top 0.254: J1.19 38.09,76.19 39.68,74.61 39.68,21.53 38.15,20 J2.19
10/COPI1
  Top 0.254: J4.19 103.6,76.19 105.19,74.61 105.19,21.53 103.66,20 J6.19
10/COPI2
  Top 0.254: J9.19 38.09,163.5 39.68,161.92 39.68,108.83 38.15,107.31 J10.19
10/COPI3
  Top 0.254: J13.19 103.6,163.5 105.19,161.92 105.19,108.83 103.66,107.31 J14.19
11/SCLK
  Top 0.254: J1.23 43.06,78.13 43.06,20.12 J2.23
11/SCLK1
  Top 0.254: J4.23 108.57,78.13 108.57,20.12 J6.23
11/SCLK2
  Top 0.254: J9.23 43.06,165.44 43.06,107.43 J10.23
11/SCLK3
  Top 0.254: J13.23 108.57,165.44 108.57,107.43 J14.23
12/PWM0
  Top 0.254: J1.32 53.33,82.04 52.06,80.77 52.06,75.91 53.24,74.72 53.24,22.85 52.04,21.64 52.04,18.76 J2.32
12/PWM1
  Top 0.254: J4.32 118.84,82.04 117.57,80.77 117.57,75.91 118.75,74.72 118.75,22.85 117.55,21.64 117.55,18.76 J6.32
12/PWM2
  Top 0.254: J9.32 53.33,169.35 52.06,168.08 52.06,163.22 53.24,162.03 53.24,110.16 52.04,108.95 52.04,106.07 J10.32
12/PWM3
  Top 0.254: J13.32 118.84,169.35 117.57,168.08 117.57,163.22 118.75,162.03 118.75,110.16 117.55,108.95 117.55,106.07 J14.32
13/PWM1
  Top 0.254: J1.33 55.87,76.47 57.47,74.87 57.47,21.59 57.15,21.27 57.14,21.27 J2.33
13/PWM2
  Top 0.254: J4.33 121.38,76.47 122.98,74.87 122.98,21.59 122.66,21.27 122.65,21.27 J6.33
13/PWM3
  Top 0.254: J9.33 55.87,163.78 57.47,162.18 57.47,108.89 57.15,108.58 57.14,108.58 J10.33
13/PWM4
  Top 0.254: J13.33 121.38,163.78 122.98,162.18 122.98,108.89 122.66,108.58 122.65,108.58 J14.33
14/TXO
  Top 0.254: J1.8 22.85,81.75 23.87,80.73 23.87,75.52 22.87,74.52 22.87,22.23 21.59,20.95 21.59,19.2 22.85,17.94 J2.8
14/TXO1
  Top 0.254: J4.8 88.36,81.75 89.38,80.73 89.38,75.52 88.38,74.52 88.38,22.23 87.1,20.95 87.1,19.2 88.36,17.94 J6.8
14/TXO2
  Top 0.254: J9.8 22.85,169.06 23.87,168.05 23.87,162.83 22.87,161.83 22.87,109.55 21.59,108.27 21.59,106.52 22.85,105.25 J10.8
14/TXO3
  Top 0.254: J13.8 88.36,169.06 89.38,168.05 89.38,162.83 88.38,161.83 88.38,109.55 87.1,108.27 87.1,106.52 88.36,105.25 J14.8
15/RXI
  Top 0.254: J1.10 25.39,82.75 24.37,81.73 24.37,75.02 23.56,74.2 23.56,21.84 24.12,21.27 24.12,18.73 J2.10
15/RXI1
  Top 0.254: J4.10 90.9,82.75 89.88,81.73 89.88,75.02 89.07,74.2 89.07,21.84 89.63,21.27 89.63,18.73 J6.10
15/RXI2
  Top 0.254: J9.10 25.39,170.06 24.37,169.05 24.37,162.33 23.56,161.52 23.56,109.15 24.12,108.58 24.12,106.04 J10.10
15/RXI3
  Top 0.254: J13.10 90.9,170.06 89.88,169.05 89.88,162.33 89.07,161.52 89.07,109.15 89.63,108.58 89.63,106.04 J14.10
18/PCM_CLK
  Top 0.254: J1.12 27.93,81.2 26.87,80.14 26.87,75.8 27.87,74.8 27.87,22.32 26.68,21.12 26.68,18.72 J2.12
18/PCM_CLK1
  Top 0.254: J4.12 93.44,81.2 92.38,80.14 92.38,75.8 93.38,74.8 93.38,22.32 92.19,21.12 92.19,18.72 J6.12
18/PCM_CLK2
  Top 0.254: J9.12 27.93,168.51 26.87,167.45 26.87,163.11 27.87,162.11 27.87,109.62 26.68,108.43 26.68,106.03 J10.12
18/PCM_CLK3
  Top 0.254: J13.12 93.44,168.51 92.38,167.45 92.38,163.11 93.38,162.11 93.38,109.62 92.19,108.43 92.19,106.03 J14.12
19/PCM_FS
  Top 0.254: J1.35 58.41,75.95 59.03,75.33 59.03,21.57 58.41,20.96 J2.35
19/PCM_FS1
  Top 0.254: J4.35 123.92,75.95 124.54,75.33 124.54,21.57 123.92,20.96 J6.35
19/PCM_FS2
  Top 0.254: J9.35 58.41,163.26 59.03,162.64 59.03,108.88 58.41,108.27 J10.35
19/PCM_FS3
  Top 0.254: J13.35 123.92,163.26 124.54,162.64 124.54,108.88 123.92,108.27 J14.35
20/PCM_DIN
  Top 0.254: J1.38 60.95,81.23 59.73,80.01 59.73,18.76 60.95,17.53 J2.38
20/PCM_DIN1
  Top 0.254: J4.38 126.46,81.23 125.24,80.01 125.24,18.76 126.46,17.53 J6.38
20/PCM_DIN2
  Top 0.254: J9.38 60.95,168.54 59.73,167.32 59.73,106.07 60.95,104.84 J10.38
20/PCM_DIN3
  Top 0.254: J13.38 126.46,168.54 125.24,167.32 125.24,106.07 126.46,104.84 J14.38
21/PCM_DOUT
  Top 0.254: J1.40 63.49,82.06 65.37,80.18 65.37,76.23 61.37,72.23 61.37,21.73 62.15,20.95 62.15,18.81 J2.40
21/PCM_DOUT1
  Top 0.254: J4.40 129,82.06 130.88,80.18 130.88,76.23 126.88,72.23 126.88,21.73 127.66,20.95 127.66,18.81 J6.40
21/PCM_DOUT2
  Top 0.254: J9.40 63.49,169.38 65.37,167.5 65.37,163.55 61.37,159.55 61.37,109.05 62.15,108.27 62.15,106.12 J10.40
21/PCM_DOUT3
  Top 0.254: J13.40 129,169.38 130.88,167.5 130.88,163.55 126.88,159.55 126.88,109.05 127.66,108.27 127.66,106.12 J14.40
GND  (via drill 0.38)  (63 unrouted)
  Bottom 0.254: J2.6 18.98,18.8 18.98,21.57 | J2.30 49.59,18.66 49.59,20.93 | J2.34 54.62,18.71 54.62,20.98 | J2.14 29.22,18.71 29.22,21.08 | J2.20 36.84,18.71 36.84,21.08
  other vias: 13.23,73.87 20.44,71.22 30.44,71.26 30.44,67.76 37.44,67.26 36.94,71.76 45.94,71.26 45.94,67.26 50.94,67.26 50.94,71.26 56.2,71.26 56.28,67.3 63.63,80.69 62.4,67.13 26.24,72.56 25.94,67.76 16.89,39.74 66.21,35.6 62.4,71.13 20.29,81.02 30.47,80.94 38.12,80.92 46.46,80.68 50.71,80.83 55.92,80.78 25.44,80.95 18.44,74.22 12.86,48.8 19.47,22.78 12.81,28.75 12.94,55.72 13.06,65.22 19.44,65.22 19.44,55.72 55.57,22.01 66.92,17.2 19.27,85.97 30.45,86.1 38.07,86.1 50.77,86.1 55.85,86.1 49.99,22.01 29.76,21.89 36.74,22.02 12.89,41.74 66.08,68.84
  pour Top (isolate 0.305): 6.86,15.24 6.86,93.66 71.86,93.66 71.86,15.24
  pour Bottom (isolate 0.305): 6.86,15.24 6.86,93.66 71.86,93.66 71.86,15.24
GND1  (via drill 0.38)  (63 unrouted)
  Bottom 0.254: J6.6 84.49,18.8 84.49,21.57 | J6.30 115.1,18.66 115.1,20.93 | J6.34 120.13,18.71 120.13,20.98 | J6.14 94.73,18.71 94.73,21.08 | J6.20 102.35,18.71 102.35,21.08
  other vias: 78.74,73.87 85.95,71.22 95.95,71.26 95.95,67.76 102.95,67.26 102.45,71.76 111.45,71.26 111.45,67.26 116.45,67.26 116.45,71.26 121.71,71.26 121.79,67.3 129.14,80.69 127.91,67.13 91.75,72.56 91.45,67.76 82.4,39.74 131.72,35.6 127.91,71.13 85.8,81.02 95.98,80.94 103.63,80.92 111.97,80.68 116.22,80.83 121.43,80.78 90.95,80.95 83.95,74.22 78.37,48.8 84.98,22.78 78.32,28.75 78.45,55.72 78.57,65.22 84.95,65.22 84.95,55.72 121.08,22.01 132.43,17.2 84.78,85.97 95.96,86.1 103.58,86.1 116.28,86.1 121.36,86.1 115.5,22.01 95.27,21.89 102.25,22.02 78.4,41.74 131.59,68.84
  pour Top (isolate 0.305): 72.37,15.24 72.37,93.66 137.37,93.66 137.37,15.24
  pour Bottom (isolate 0.305): 72.37,15.24 72.37,93.66 137.37,93.66 137.37,15.24
GND2  (via drill 0.38)  (63 unrouted)
  Bottom 0.254: J10.6 18.98,106.11 18.98,108.88 | J10.30 49.59,105.97 49.59,108.23 | J10.34 54.62,106.02 54.62,108.28 | J10.14 29.22,106.02 29.22,108.39 | J10.20 36.84,106.02 36.84,108.39
  other vias: 13.23,161.18 20.44,158.53 30.44,158.57 30.44,155.07 37.44,154.57 36.94,159.07 45.94,158.57 45.94,154.57 50.94,154.57 50.94,158.57 56.2,158.57 56.28,154.61 63.63,168 62.4,154.44 26.24,159.87 25.94,155.07 16.89,127.05 66.21,122.91 62.4,158.44 20.29,168.33 30.47,168.25 38.12,168.23 46.46,167.99 50.71,168.14 55.92,168.09 25.44,168.26 18.44,161.53 12.86,136.11 19.47,110.09 12.81,116.06 12.94,143.03 13.06,152.53 19.44,152.53 19.44,143.03 55.57,109.32 66.92,104.51 19.27,173.28 30.45,173.41 38.07,173.41 50.77,173.41 55.85,173.41 49.99,109.32 29.76,109.2 36.74,109.33 12.89,129.05 66.08,156.15
  pour Top (isolate 0.305): 6.86,102.55 6.86,180.97 71.86,180.97 71.86,102.55
  pour Bottom (isolate 0.305): 6.86,102.55 6.86,180.97 71.86,180.97 71.86,102.55
GND3  (via drill 0.38)  (63 unrouted)
  Bottom 0.254: J14.6 84.49,106.11 84.49,108.88 | J14.30 115.1,105.97 115.1,108.23 | J14.34 120.13,106.02 120.13,108.28 | J14.14 94.73,106.02 94.73,108.39 | J14.20 102.35,106.02 102.35,108.39
  other vias: 78.74,161.18 85.95,158.53 95.95,158.57 95.95,155.07 102.95,154.57 102.45,159.07 111.45,158.57 111.45,154.57 116.45,154.57 116.45,158.57 121.71,158.57 121.79,154.61 129.14,168 127.91,154.44 91.75,159.87 91.45,155.07 82.4,127.05 131.72,122.91 127.91,158.44 85.8,168.33 95.98,168.25 103.63,168.23 111.97,167.99 116.22,168.14 121.43,168.09 90.95,168.26 83.95,161.53 78.37,136.11 84.98,110.09 78.32,116.06 78.45,143.03 78.57,152.53 84.95,152.53 84.95,143.03 121.08,109.32 132.43,104.51 84.78,173.28 95.96,173.41 103.58,173.41 116.28,173.41 121.36,173.41 115.5,109.32 95.27,109.2 102.25,109.33 78.4,129.05 131.59,156.15
  pour Top (isolate 0.305): 72.37,102.55 72.37,180.97 137.37,180.97 137.37,102.55
  pour Bottom (isolate 0.305): 72.37,102.55 72.37,180.97 137.37,180.97 137.37,102.55
GP1  (via drill 0.38)
  Top 0.254: J4.7 88.43,78.17 88.43,75.62 87.61,74.8 v87.61,22.73
  Bottom 0.254: J6.7 88.36,21.98 v87.61,22.73
GP2
  Top 0.254: J4.29 116.3,76.13 118.04,74.39 118.04,22.92 116.3,21.19 J6.29
GP3
  Top 0.254: J4.31 118.84,75.56 119.37,75.03 119.37,22.73 118.84,22.21 J6.31
GP4  (via drill 0.38)
  Top 0.254: J1.7 22.92,78.17 22.92,75.62 22.1,74.8 v22.1,22.73
  Bottom 0.254: J2.7 22.85,21.98 v22.1,22.73
GP5
  Top 0.254: J1.29 50.79,76.13 52.53,74.39 52.53,22.92 50.79,21.19 J2.29
GP6
  Top 0.254: J1.31 53.33,75.56 53.86,75.03 53.86,22.73 53.33,22.21 J2.31
GP7
  Top 0.254: J4.36 123.92,81.76 122.86,80.7 122.86,75.95 123.78,75.03 123.78,21.73 122.66,20.61 122.66,18.73 J6.36
GP8
  Top 0.254: J4.11 93.44,76.19 94.01,75.61 94.01,21.85 93.44,21.28 J6.11
GP9
  Top 0.254: J4.15 98.52,76.41 99,75.93 99,21.67 98.52,21.19 J6.15
GP10
  Top 0.254: J4.16 98.52,81.69 97.38,80.55 97.38,76.3 98.16,75.52 98.16,21.52 97.25,20.61 97.25,18.74 J6.16
GP11
  Top 0.254: J4.18 101.06,81.91 99.78,80.63 99.78,22.03 99.78,18.75 J6.18
GP12
  Top 0.254: J4.22 106.14,81.04 104.88,79.78 104.88,76.27 106.02,75.12 106.02,21.73 104.88,20.59 104.88,18.73 J6.22
GP13
  Top 0.254: J4.37 126.46,76.32 125.93,75.79 125.93,20.54 J6.37
GP14
  Top 0.254: J4.13 95.98,76.16 97.38,74.77 97.38,21.4 J6.13
GP15  (via drill 0.38)
  Top 0.254: J9.7 22.92,165.48 22.92,162.94 22.1,162.12 v22.1,110.05
  Bottom 0.254: J10.7 22.85,109.29 v22.1,110.05
GP16
  Top 0.254: J1.36 58.41,81.76 57.35,80.7 57.35,75.95 58.27,75.03 58.27,21.73 57.15,20.61 57.15,18.73 J2.36
GP17
  Top 0.254: J1.11 27.93,76.19 28.5,75.61 28.5,21.85 27.93,21.28 J2.11
GP18
  Top 0.254: J9.29 50.79,163.44 52.53,161.7 52.53,110.23 50.79,108.5 J10.29
GP19
  Top 0.254: J9.31 53.33,162.87 53.86,162.34 53.86,110.05 53.33,109.52 J10.31
GP20
  Top 0.254: J9.36 58.41,169.07 57.35,168.01 57.35,163.27 58.27,162.34 58.27,109.05 57.15,107.92 57.15,106.04 J10.36
GP21
  Top 0.254: J9.11 27.93,163.5 28.5,162.92 28.5,109.16 27.93,108.59 J10.11
GP22
  Top 0.254: J1.15 33.01,76.41 33.49,75.93 33.49,21.67 33.01,21.19 J2.15
GP23
  Top 0.254: J1.16 33.01,81.69 31.87,80.55 31.87,76.3 32.65,75.52 32.65,21.52 31.74,20.61 31.74,18.74 J2.16
GP24
  Top 0.254: J1.18 35.55,81.91 34.27,80.63 34.27,22.03 34.27,18.75 J2.18
GP25
  Top 0.254: J1.22 40.63,81.04 39.37,79.78 39.37,76.27 40.51,75.12 40.51,21.73 39.37,20.59 39.37,18.73 J2.22
GP26
  Top 0.254: J1.37 60.95,76.32 60.42,75.79 60.42,20.54 J2.37
GP27
  Top 0.254: J1.13 30.47,76.16 31.87,74.77 31.87,21.4 J2.13
GP28
  Top 0.254: J9.15 33.01,163.72 33.49,163.24 33.49,108.98 33.01,108.5 J10.15
GP29
  Top 0.254: J9.16 33.01,169 31.87,167.87 31.87,163.61 32.65,162.83 32.65,108.82 31.74,107.91 31.74,106.05 J10.16
GP30
  Top 0.254: J9.18 35.55,169.23 34.27,167.95 34.27,109.34 34.27,106.06 J10.18
GP31
  Top 0.254: J9.22 40.63,168.35 39.37,167.09 39.37,163.58 40.51,162.43 40.51,109.05 39.37,107.9 39.37,106.04 J10.22
GP32
  Top 0.254: J9.37 60.95,163.63 60.42,163.1 60.42,107.84 J10.37
GP33
  Top 0.254: J9.13 30.47,163.48 31.87,162.08 31.87,108.7 J10.13
GP34  (via drill 0.38)
  Top 0.254: J13.7 88.43,165.48 88.43,162.94 87.61,162.12 v87.61,110.05
  Bottom 0.254: J14.7 88.36,109.29 v87.61,110.05
GP35
  Top 0.254: J13.29 116.3,163.44 118.04,161.7 118.04,110.23 116.3,108.5 J14.29
GP36
  Top 0.254: J13.31 118.84,162.87 119.37,162.34 119.37,110.05 118.84,109.52 J14.31
GP37
  Top 0.254: J13.36 123.92,169.07 122.86,168.01 122.86,163.27 123.78,162.34 123.78,109.05 122.66,107.92 122.66,106.04 J14.36
GP38
  Top 0.254: J13.11 93.44,163.5 94.01,162.92 94.01,109.16 93.44,108.59 J14.11
GP39
  Top 0.254: J13.15 98.52,163.72 99,163.24 99,108.98 98.52,108.5 J14.15
GP40
  Top 0.254: J13.16 98.52,169 97.38,167.87 97.38,163.61 98.16,162.83 98.16,108.82 97.25,107.91 97.25,106.05 J14.16
GP41
  Top 0.254: J13.18 101.06,169.23 99.78,167.95 99.78,109.34 99.78,106.06 J14.18
GP42
  Top 0.254: J13.22 106.14,168.35 104.88,167.09 104.88,163.58 106.02,162.43 106.02,109.05 104.88,107.9 104.88,106.04 J14.22
GP43
  Top 0.254: J13.37 126.46,163.63 125.93,163.1 125.93,107.84 J14.37
GP44
  Top 0.254: J13.13 95.98,163.48 97.38,162.08 97.38,108.7 J14.13

## Text on the board
Bottom: v10 | v10 | v10 | v10
Dimension: Route Out | Route Out | Route Out | Route Out | Route Out | Route Out
Milling: v-score | v-score | v-score